# Altium PCB LSR41.PcbDoc (part 2 of 2)
Units mm, origin at the board's own origin, x right, y up, seen from the top; angles counter-clockwise.
Board outline 207.01 x 107.19 mm, 2 copper layers (Top Layer, Bottom Layer), stack 1.671 mm thick; 209 components, 141 nets, 682 pads, 307 vias.
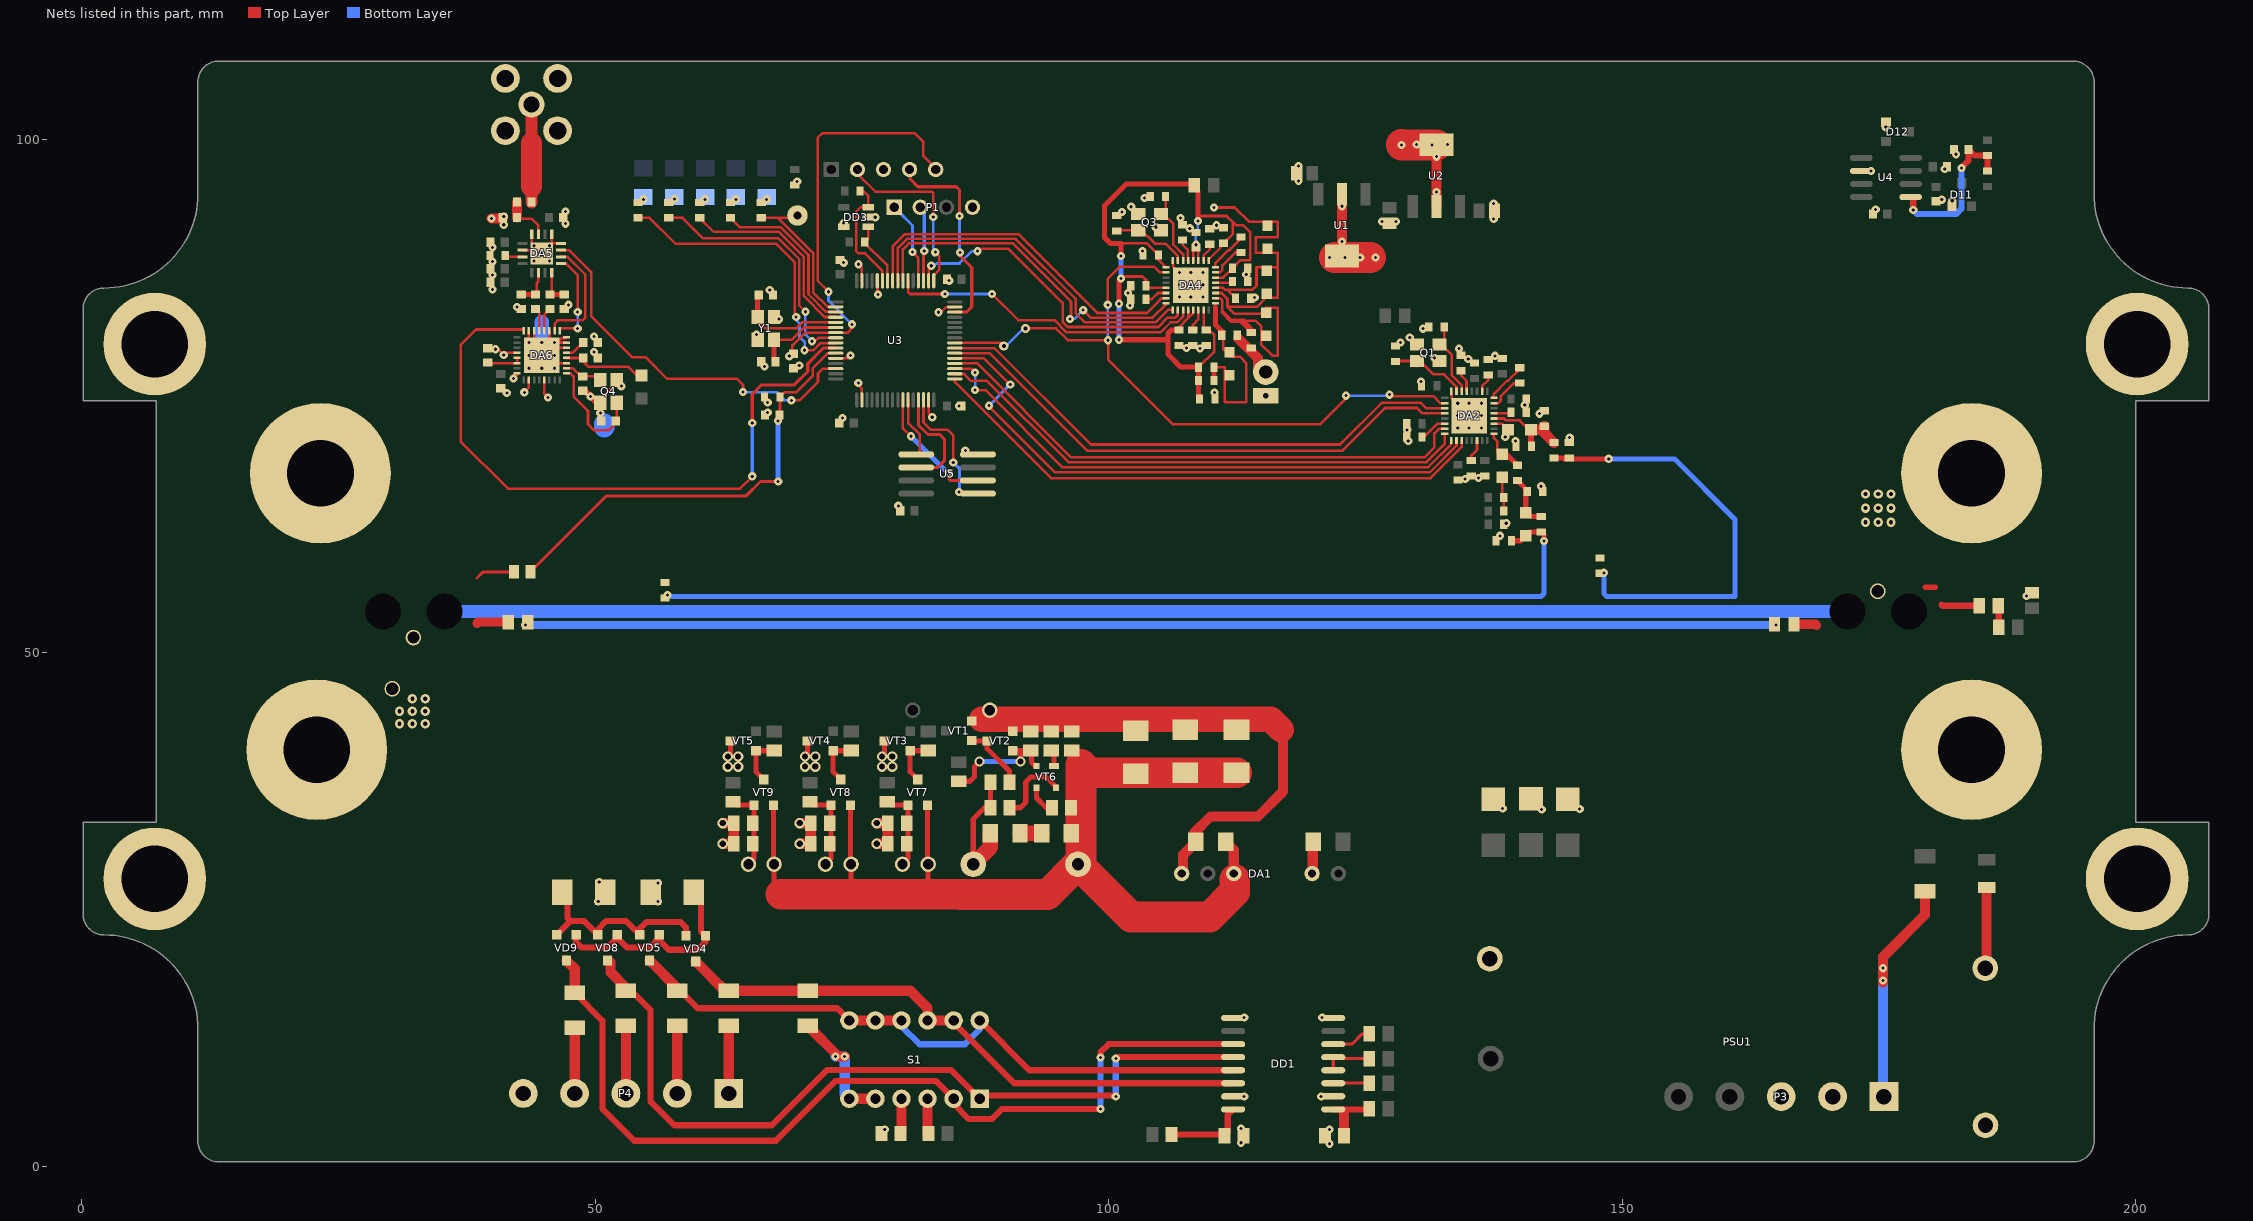
[diagram p2: the nets of this part, all layers, seen from the top]

## Via types
v1: diameter 0.8, hole 0.3, Top Layer to Bottom Layer, tented both sides, 263 vias
v2: diameter 1, hole 0.6, Top Layer to Bottom Layer, tented both sides, 21 vias
v3: diameter 0.9, hole 0.4, Top Layer to Bottom Layer, tented both sides, 19 vias
v4: diameter 0.5, hole 0.3, Top Layer to Bottom Layer, tented both sides, 4 vias

## Nets (pads, with @x,y where several pads share a name; then routed paths per layer and width w, separated by ;. In a path a pad name is that pad's centre, name@x,y a point inside that pad or via, vN(x,y) a via of type N, cw(c..) or ccw(c..) an arc to the next point about the centre after c; other vN are vias at no path point) (continued)
GND: C1.1 C7.1 C10.1 C11.1 C12.1 C13.1 C14.2 C15.1 C16.2 C17.1 C18.1 C19.1 C22.1 C23.1 C25.1 C26.1 C27.1 C28.1 C30.1 C31.2 C32.2 C33.2 C34.1 C35.2 C36.2 C38.1 C39.2 C40.2 C42.2 C43.2 C44.2 C45.2 C46.2 C47.2 C48.1 C49.1 C50.1 C51.1 C53.1 C56.1 C57.1 C60.2 C61.1 C63.2 C65.1 C67.1 C67.2 C69.1 C71.1 C80.1 C81.1 C82.1 C83.1 C87.1 C88.1 C89.2 C90.2 C92.2 C93.1 C95.1 C96.1 C97.1 C99.1 C100.1 C101.1 C102.1 C103.2 D2.1 D3.1 D4.1 D11.1 D12.1 DA1.2 DA2.19 DA2.32 DA2.33 DA4.18 DA4.19 DA4.20 DA4.32 DA4.33 DA5.8 DA5.9 DA5.12 DA5.14 DA5.17 DA6.3 DA6.6 DA6.7 DA6.12 DA6.16 DA6.18 DA6.21 DA6.27 DA6.30 DA6.31 DA6.32 DA6.33 DD1.2 DD1.8 DD3.2 DD3.5 FV3.1 L1.1 L7.1 L7.2 L9.1 L9.2 L11.1 L11.2 P1.4 P3.2 P3.3 pad.0@7.12,28 pad.0@7.12,80.07 pad.0@22.9,40.575 pad.0@23.25,67.5 pad.0@115.3,75.05 pad.0@184.03,40.575 pad.0@184.03,67.5 pad.0@200.16,28 pad.0@200.16,80.07 pad.2@41.26,100.86 pad.3 pad.4@46.34,105.94 pad.5@41.26,105.94 PSU1.2 PSU1.4 Q1.2 Q1.4 Q3.2 Q3.4 Q4.2 Q4.4 R33.1 R34.1 R36.1 R38.2 R39.2 R40.2 R53.1 R54.1 U1.2 U1.4 U2.2 U2.4 U3.12 U3.18 U3.31 U3.47 U3.60 U3.63 U4.2 U5.4 Y1.2 Y1.4 | length 133.1
  Top Layer w0.25: DA5.14@42.925,89.225 DA5.17@44.475,89.225 ; DA5.17@43.825,89.875 DA5.12@43.825,90.775 ; DA6.6@44.05,81.375 44.05,79.725 v1(44.8,78.975) ; DA5.17@44.55,89.15 v2(44.8,88.9) v4(45.55,89.65) ; DA5.9@45.775,90.775 45.775,89.875 DA5.8@46.675,89.875 ; U3.12@73.423,78.689 74.614,78.689 v1(74.875,78.95) ; v1(75.625,76.275) 75.625,76.1 75.973,75.752 U3.18@75.973,74.639 ; v1(75.65,87.85) 75.7,87.85 75.973,87.577 U3.63@75.973,86.239 ; U3.60@77.473,86.239 77.498,86.214 77.498,84.952 v1(77.55,84.9) ; U3.31@82.473,74.639 82.473,73.302 v1(82.825,72.95) ; v1(83.425,83.175) 83.7,83.175 84.189,83.664 84.998,83.664 U3.47@85.023,83.689 ; DA4.32@106.25,88.2 106.25,87.835 106.275,87.81 106.275,87.575 DA4.33@106.6,87.25 ; v1(110.25,93.375) 112.275,93.375 113.65,92 116.45,92 116.45,90.475 114.325,90.475 114.325,88.95 116.45,88.95 116.45,84.6 115.35,84.6 114.45,83.7 111.575,83.7 112.225,83.05 114.775,83.05 115.325,83.6 116.475,83.6 116.475,78.95 115.95,78.95 114.85,80.05 114.85,81.825 114.325,82.35 113.15,82.35 ; DA4.18@110.4,84.55 110.864,84.55 111.075,84.339 111.075,83.217 ; DA4.19@110.4,85.05 111,85.05 111.575,84.475 ; DA4.20@110.4,85.55 111.136,85.55 111.311,85.375 111.525,85.375 ; C67.2@112.35,84.85 C67.2@112.35,84.55 111.525,85.375 ; 116.4,87.55 114.4,87.55 114.4,85.74 114.035,85.375 111.525,85.375 ; DA2.32@133.376,75.479 133.376,75.113 133.401,75.088 133.401,74.804 DA2.33@135.126,73.079 ; DA2.19@137.526,72.329 138.306,72.329 L1.1@138.906,71.729
  Top Layer w0.254: v1(40.3,79.575) 40.55,79.575 v1(41.1,79.025) 41.3,79.225 DA6.12@42.4,79.225 ; v1(42.05,76.725) 42.4,77.075 DA6.16@42.4,77.225 ; v1(43.1,75.375) 43.55,75.825 DA6.18@43.55,76.575 ; DA6.7@43.55,81.375 v1(43.55,80.225) DA6.33@44.05,79.725 ; DA6.33@44.8,79.914 v1(44.8,78.975) ; DA6.21@45.05,76.575 45.05,75.225 v1(45.4,74.875) ; DA6.3@45.55,81.375 45.55,79.725 DA6.33@45.8,79.725 ; DA6.27@47.2,78.225 45.55,78.225 v1(44.8,78.975) ; DA6.30@47.2,79.725 DA6.33@45.8,79.725 ; DA6.31@47.2,80.225 DA6.33@46.3,80.225 ; DA6.32@47.2,80.725 47.133,80.658 46.733,80.658 DA6.33@46.3,80.225 ; Q4.2@50.5,74.375 50.5,74.756 52.1,76.356 Q4.4@52.1,76.575 ; DA2.33@134.187,73.079 DA2.33@135.126,73.079 ; DA2.33@134.376,74.079 135.126,73.329 DA2.33@135.126,73.079 ; DA2.33@135.876,73.829 DA2.33@135.126,73.079 ; v1(44.8,78.975) 45.05,78.975 DA6.33@45.8,79.725 ; DA6.33@45.8,79.725 DA6.33@46.3,80.225
  Top Layer w0.3: 111.575,83.7 111.575,84.475
  Top Layer w0.4: 111.075,83.217 111.125,83.167 111.125,83.16 111.935,82.35 113.15,82.35
  Top Layer w0.6: C102.1@48.8,75.525 49,75.525 v1(49.55,74.975) 50.15,74.375 Q4.2@50.5,74.375 ; 113.05,82.25 C71.1@113.9,81.4
  Top Layer w1: v1(39.9,92.3) C100.1@41,92.3 ; DA1.2@119.875,29.125 119.875,31.575 C1.1@119.925,31.625 ; U1.4@122.725,88.65 U1.2@122.725,94.65 ; U2.2@131.925,93.475 U2.4@131.925,99.475
  Top Layer w3: U1.4@122,88.5 125.5,88.5 ; v1@128.5,99.5 v1(128.525,99.475) U2.4@131.925,99.475
  Bottom Layer w1.4: v1@44.8,80.475 44.8,82.225
  Bottom Layer w2: 50.9,72 50.9,72.3
  other v1: 121.5,2.2 121.5,3.6 120.7,6.8 120.8,14.5 142.175,34.75 145.875,34.8 138.375,34.85 189.375,55.55 138.1,61.404 138.726,62.629 79.525,64.325 142.126,66.229 134.726,66.929 136.026,67.029 86.05,69.7 129.176,70.629 139.626,70.629 144.901,70.979 138.626,71.029 129.076,71.729 133.998,71.912 135.098,71.912 136.298,71.912 74.1,72.875 133.998,73.112 135.098,73.112 136.298,73.112 141.951,73.3 50.5,73.375 66.8,73.4 85.427,74.036 140.526,74.129 133.998,74.312 135.098,74.312 136.298,74.312 66.8,74.375 41.4,75.3 110.325,75.35 52.55,75.975 130.426,76.429 43.55,77.725 44.8,77.725 46.05,77.725 66.5,77.889 69.875,78 135.026,78.629 131.726,78.729 137.626,78.929 43.55,78.975 46.05,78.975 49.9,79.3 108.9,79.65 134.126,79.629 107.575,79.7 44.8,80.225 46.05,80.225 128.426,80.229 129.326,80.729 49.9,80.8 65.7,81 130.626,81.579 67.9,82.5 42.4,83.7 102.075,83.825 47.4,83.9 114.225,84.6 106.9,84.65 108,84.65 109.2,84.65 101.9,85.05 67,85.339 40,85.4 106.9,85.85 108,85.85 109.2,85.85 84.475,86.25 40,86.8 113.4,86.85 106.9,87.05 108,87.05 109.2,87.05 74.2,88 40,88.1 121.5,88.5 123,88.5 124.5,88.5 126,88.5 103.3,89.15 40,89.5 122.725,90.05 107.9,91.35 104.6,91.45 110.5,91.65 41.1,91.7 47.1,91.8 74.2,91.85 126.625,92 128,92 137.5,92.25 107,92.35 77.275,92.425 41.1,92.5 101.3,92.95 47.1,93 174.699,93.186 102.2,93.45 122.725,93.5 137.5,93.775 182.152,94.035 181.131,94.135 103.5,94.3 131.925,94.875 69.675,95.9 118.5,95.975 174.252,96.935 181.427,97.135 118.5,97.425 131.925,98.325 182.527,98.56 131.5,99.475 130,99.5 133,99.5 175.675,101.2
  other v3: 30.95,43.1 32.2,43.1 33.45,43.1 30.95,44.319 32.2,44.319 33.45,44.319 32.2,45.538 33.45,45.538 173.7,62.728 174.95,62.728 176.2,62.728 173.7,64.1 174.95,64.1 176.2,64.1 173.7,65.472 174.95,65.472 176.2,65.472
  other v4: 44.05,88.15 45.55,88.15 44.05,89.65
GND_1: C2.1 C3.1 DA1.5 FU1.1 R13.1 R16.2 VD1.2 VD2.2 VD3.2 VT7.2 VT8.2 VT9.2 XT6.1 XT7.1 XT8.1 | length 113.7
  Top Layer w0.5: XT8.1@67.375,29.475 VT9.2@67.375,35.175 ; XT8.1@67.425,29.425 67.425,27.15 68.075,26.5 ; XT7.1@74.875,29.475 VT8.2@74.875,35.175 ; XT7.1@74.925,29.425 74.925,26.525 74.95,26.5 ; 82.325,26.5 82.425,26.6 XT6.1@82.425,29.425 ; XT6.1@82.375,29.475 VT7.2@82.375,35.175 ; 84.425,27.425 93.425,27.425
  Top Layer w1: C2.1@111.402,31.596 112.195,30.804 DA1.5@112.195,28.515
  Top Layer w3: 68.075,26.5 74.95,26.5 82.325,26.5 85.578,26.5 85.603,26.475 94.075,26.475 FU1.1@97.025,29.425 ; DA1.5@112.275,27.925 112.275,26.7 109.85,24.275 102.175,24.275 FU1.1@97.025,29.425 ; VD3.2@112.45,38.325 VD2.2@107.45,38.325 98.15,38.325 97.325,39.15 97.325,29.725 FU1.1@97.025,29.425
GND_IS1: C4.1 C5.1 C6.1 C9.1 DD1.9 DD1.15 FU1.2 P4.5 R10.1 R11.1 R12.1 R14.1 R15.1 R17.1 R24.1 VD6.1 VD7.2 VT3.3 VT4.3 VT5.3 | length 37.5
  Top Layer w0.25: v2@62.9,38.95 v2(62.925,38.925) v2(63.925,38.925) v2(63.925,39.925) v2(62.925,39.925) ; v2@70.4,39.9 v2(70.425,39.925) v2(71.425,39.925) v2(71.425,38.925) v2(70.425,38.925) ; v2@77.9,38.95 v2(77.925,38.925) v2(78.925,38.925) v2(78.925,39.925) v2(77.925,39.925)
  Top Layer w0.5: v2@63.175,40.175 VT5.3@63.175,41.425 ; v2@70.675,40.175 VT4.3@70.675,41.425 ; v2@78.175,40.175 VT3.3@78.175,41.425 ; FU1.2@86.825,29.425 86.825,33.825 87.925,34.925 R14.1@88.5,34.925 R15.1@88.5,36.925
  Top Layer w1: v2(62.425,31.425) R12.1@63.5,31.425 C6.1@63.5,33.425 v2(62.425,33.425) ; v2(69.925,31.425) R11.1@71,31.425 C5.1@71,33.425 v2(69.925,33.425) ; v2(77.425,31.425) R10.1@78.5,31.425 C4.1@78.5,33.425 v2(77.425,33.425)
  Top Layer w1.5: FU1.2@86.825,29.425 88.475,31.075 R17.1@88.475,32.425
  other v1: 112.9,2.3 78.2,3.6 112.9,3.7 113.2,6.8 113.2,14.5 50.3,25.8 56.1,25.8 56.1,27.6 50.4,27.7
HGM: DA5.7 U3.14 | length 37.5
  Top Layer w0.25: DA5.7@46.675,89.225 47.475,89.225 49.6,87.1 49.6,82.8 53.6,78.8 54.9,78.8 57,76.7 63.8,76.7 64.4,76.1 v1(64.4,75.4) ; v1(69.1,74.6) 69.9,74.6 71.7,76.4 71.7,77.2 72.189,77.689 U3.14@73.423,77.689
  Bottom Layer w0.25: v1(64.4,75.4) 67.7,75.4 68.5,74.6 v1(69.1,74.6)
I2C1_SCL: DD3.1 R50.1 U3.58 | length 6.4
  Top Layer w0.25: DD3.1@76.6,91.5 76.6,90.375 76.2,89.975 78.448,87.727 78.448,86.264 U3.58@78.473,86.239
I2C1_SDA: DD3.3 R48.1 U3.59 | length 11.3
  Top Layer w0.25: R48.1@76.1,94.975 76.6,94.475 DD3.3@76.6,93.4 75.85,93.4 75.425,92.975 75.425,89.125 75.65,88.9 76.275,88.9 77.948,87.227 77.948,86.264 U3.59@77.973,86.239
LED1: pad.0@69.7,92.6 R41.2 U3.2 | length 15
  Top Layer w0.25: R41.2@66.178,92.371 67.804,92.371 ; pad.0@69.7,92.6 69.071,92.371 67.804,92.371 ; U3.2@73.423,83.689 73.398,83.714 72.626,83.714 71.225,85.115 71.225,88.95 67.804,92.371
LED2: R42.2 U3.3 | length 16.3
  Top Layer w0.25: R42.2@63.178,92.371 64.099,91.45 68.086,91.45 70.775,88.761 70.775,84.929 72.49,83.214 73.398,83.214 U3.3@73.423,83.189
LED3: R43.2 U3.4 | length 19.5
  Top Layer w0.25: R43.2@60.178,92.371 61.549,91 67.9,91 70.325,88.575 70.325,84.742 72.353,82.714 73.398,82.714 U3.4@73.423,82.689
LED4: R44.2 U3.8 | length 25.3
  Top Layer w0.25: R44.2@57.178,92.371 58.504,92.371 60.475,90.4 67.825,90.4 69.875,88.35 69.875,83.825 v1(70.475,83.225) ; v1(71.125,80.35) 71.425,80.35 71.764,80.689 U3.8@73.423,80.689
  Bottom Layer w0.25: v1(70.475,83.225) 70.475,81 v1(71.125,80.35)
LED5: R47.2 U3.9 | length 29.3
  Top Layer w0.25: R47.2@54.178,92.371 55.304,92.371 57.85,89.825 67.65,89.825 69.425,88.05 69.425,82.85 v1(69.575,82.7) ; v1(70.392,79.473) 71.273,79.473 71.965,80.164 73.398,80.164 U3.9@73.423,80.189
  Bottom Layer w0.25: v1(69.575,82.7) 69.575,82.425 69.9,82.1 69.9,80.775 70.392,80.283 v1(70.392,79.473)
LF_IO0: DA2.10 U3.37 | length 59.3
  Top Layer w0.25: U3.37@85.023,78.689 87.861,78.689 90.15,76.4 90.15,76.15 v1@90.288,76.012 ; v1@88.325,74.05 94.8,67.575 131.272,67.575 133.876,70.179 DA2.10@133.876,70.679
  Bottom Layer w0.3: v1(88.35,74.075) v1(90.425,76.15)
LF_IO2: DA2.4 U3.38 | length 53.6
  Top Layer w0.25: U3.38@85.023,79.189 88.411,79.189 97.9,69.7 122.775,69.7 126.929,73.854 130.046,73.854 130.571,73.329 DA2.4@132.726,73.329
LF_IO3: DA2.3 U3.39 | length 53.5
  Top Layer w0.25: U3.39@85.023,79.689 85.048,79.664 88.911,79.664 98.275,70.3 122.55,70.3 126.6,74.35 130.4,74.35 130.921,73.829 DA2.3@132.726,73.829
LF_MISO: DA2.9 U3.35 | length 54.7
  Top Layer w0.25: U3.35@85.023,77.689 86.611,77.689 v1(87,77.3) v1@87,77.379 ; v1(87,75.6) 88,75.6 95.525,68.075 131.124,68.075 ; 131.118,68.081 133.376,70.34 DA2.9@133.376,70.679
  Bottom Layer w0.25: v1(87,75.6) v1(87,77.3)
LF_MOSI: DA2.7 U3.36 | length 53.5
  Top Layer w0.254: U3.36@85.023,78.175 85.06,78.212 87.188,78.212 96.35,69.05 130.747,69.05 131.726,70.029 131.726,71.39 132.165,71.829 DA2.7@132.726,71.829
LF_NCS: DA2.11 U3.33 | length 55.4
  Top Layer w0.25: U3.33@85.023,76.689 85.023,76.377 94.375,67.025 131.358,67.025 134.376,70.042 DA2.11@134.376,70.679
LF_SCK: DA2.8 U3.34 | length 53
  Top Layer w0.254: U3.34@85.023,77.189 85.046,77.166 85.934,77.166 86.6,76.5 88.15,76.5 96.075,68.575 130.972,68.575 132.726,70.329 DA2.8@132.726,71.329
MEAS_VIN: C31.1 R37.1 R38.1 U3.11 | length 43.7
  Top Layer w0.25: v1(67.8,72.6) C31.1@67.8,73.275 ; C31.1@67.95,73.175 68,73.225 R38.1@68,74.925 68.475,75.4 69.6,75.4 71.2,77 71.2,77.738 72.626,79.164 73.398,79.164 U3.11@73.423,79.189
  Top Layer w0.3: R37.1@43.7,57.9 51.1,65.3 64.7,65.3 66.1,66.7 v1(67.825,66.7)
  Bottom Layer w0.25: v1@67.8,66.775 67.8,66.725 v1(67.825,66.7)
  Bottom Layer w0.5: v1@67.8,66.775 v1(67.8,72.6)
NetC2_2: C2.2 C3.2 DA1.7 R1.2 R2.2 VD1.1 VD2.1 VD3.1 VT1.2 VT2.2 XT1.1 | length 49.6
  Top Layer w1: DA1.7@107.25,28.515 107.25,30.344 108.325,31.419 108.325,32.475 109.925,34.075 114.55,34.075 116.975,36.5 116.975,41.75
  Top Layer w2.5: 87.65,43.55 115.8,43.55 116.825,42.525
NetC4_2: C4.2 R6.1 R10.2 VT7.1 XT3.1 | length 7.7
  Top Layer w0.5: R6.1@78.75,35.175 VT7.1@80.475,35.175 80.475,29.975 XT3.1@79.925,29.425
NetC5_2: C5.2 R7.1 R11.2 VT8.1 XT4.1 | length 6.9
  Top Layer w0.5: R7.1@71.25,35.175 VT8.1@72.975,35.175 72.975,29.975
NetC6_2: C6.2 R8.1 R12.2 VT9.1 XT5.1 | length 8.2
  Top Layer w0.5: R8.1@63.425,35.5 63.75,35.175 VT9.1@65.475,35.175 65.475,29.975 XT5.1@64.925,29.425
NetC7_2: C7.2 DD1.1 R19.1 | length 5.8
  Top Layer w0.6: DD1.1@121.875,5.555 123.2,5.555 125.33,5.555 R19.1@125.375,5.6
  Top Layer w1: C7.2@122.925,3 122.925,5.28
NetC9_2: C9.2 DD1.16 R22.1 | length 8.1
  Top Layer w0.6: R22.1@106.125,3.1 111.175,3.1 C9.2@111.275,3 111.6,3.325 111.6,5.03 DD1.16@112.125,5.555
NetC16_1: C16.1 DA2.30 Q1.3 | length 7.4
  Top Layer w0.25: Q1.3@132.226,80.029 Q1.3@132.326,80.129 ; C16.1@132.676,81.729 132.676,80.479 Q1.3@132.326,80.129 ; DA2.30@134.376,75.479 134.376,76.079 133.426,77.029 133.426,79.029 Q1.3@132.326,80.129
NetC18_2: C18.2 DA2.20 L1.2 R32.2 R33.2 | length 8.9
  Top Layer w0.25: DA2.20@137.526,72.829 138.516,72.829 138.691,72.654 140.021,72.654 L1.2@141.046,71.629 ; C18.2@141.146,70.159 C18.2@141.176,70.129
  Top Layer w0.6: C18.2@141.146,70.159 L1.2@141.146,71.729
  Top Layer w1: L1.2@141.146,71.729 R33.2@142.426,71.729 ; R33.2@142.426,72.079 142.426,71.429 R32.2@143.376,70.479
NetC19_2: C19.2 DA2.31 Q1.1 | length 7.9
  Top Layer w0.25: C19.2@127.926,78.379 127.976,78.429 Q1.1@130.026,78.429 Q1.1@130.026,77.929 ; Q1.1@130.176,78.579 131.626,77.129 132.66,77.129 133.876,75.914 DA2.31@133.876,75.479
NetC20_1: C20.1 C21.1 C23.2 L2.1 | length 5.1
  Top Layer w0.5: C21.1@139.826,66.779 140.626,65.979 L2.1@140.626,63.649 ; L2.1@140.656,63.749 141.126,63.279 C20.1@142.126,63.279
NetC21_2: C21.2 DA2.17 L3.2 | length 3.9
  Top Layer w0.25: DA2.17@137.526,71.329 137.526,70.929 137.826,70.629 L3.2@137.826,69.529
  Top Layer w0.5: L3.2@138.326,69.349 138.756,69.349 C21.2@139.826,68.279
NetC24_1: C24.1 L3.1 R35.2 | length 3.3
  Top Layer w0.25: L3.1@138.326,67.109 138.326,65.279 R35.2@138.476,65.129 C24.1@138.476,63.829
NetC25_2: C25.2 DA2.26 | length 1.8
  Top Layer w0.25: DA2.26@136.376,75.479 136.376,75.979 136.976,76.579 C25.2@136.976,77.079
NetC26_2: C26.2 DA2.29 | length 2.2
  Top Layer w0.25: C26.2@134.326,77.479 134.326,77.029 134.851,76.504 134.851,75.504 DA2.29@134.876,75.479
NetC27_2: C27.2 DA2.6 | length 2.6
  Top Layer w0.25: C27.2@130.676,70.979 132.026,72.329 DA2.6@132.726,72.329
NetC28_2: C28.2 DA2.21 | length 1.7
  Top Layer w0.25: DA2.21@137.526,73.329 139.076,73.329 C28.2@139.176,73.429
NetC29_1: C29.1 DA2.23 | length 3.6
  Top Layer w0.25: DA2.23@137.526,74.329 137.96,74.329 138.201,74.569 138.201,75.014 139.466,76.279 C29.1@140.026,76.279
NetC29_2: C29.2 DA2.24 | length 4
  Top Layer w0.25: DA2.24@137.526,74.829 137.526,75.229 138.801,76.504 138.91,76.504 140.026,77.619 C29.2@140.026,77.779
NetC40_1: C40.1 U3.6 Y1.3 | length 8.7
  Top Layer w0.25: C40.1@67.423,78.514 C40.1@67.573,78.364 ; Y1.3@67.423,80.514 69.153,80.514 70.328,81.689 U3.6@73.423,81.689
  Top Layer w0.5: C40.1@67.423,78.514 Y1.3@67.423,80.514
NetC46_1: C46.1 U3.5 Y1.1 | length 10.7
  Top Layer w0.25: Y1.1@65.823,82.339 66.537,81.625 69.627,81.625 70.191,82.189 U3.5@73.423,82.189
  Top Layer w0.5: Y1.1@65.823,82.339 C46.1@65.823,84.864
NetC50_2: C50.2 R45.2 R46.2 U4.5 | length 16.1
  Top Layer w0.6: U4.5@178.1,94.395 178.352,94.143 v1(178.352,93.135) ; v1(183.052,97.235) 183.727,97.91 C50.2@183.727,99.035 184.329,98.433 R45.2@185.581,98.433 R46.2@185.581,96.933
  Bottom Layer w0.6: v1(178.352,93.135) 178.752,92.735 182.552,92.735 183.052,93.235 v1(183.052,97.235)
NetC63_1: C63.1 DA4.30 Q3.3 | length 7.4
  Top Layer w0.25: Q3.3@105.1,92.75 Q3.3@105.2,92.85 ; C63.1@105.55,94.45 105.55,93.2 Q3.3@105.2,92.85 ; DA4.30@107.25,88.2 107.25,88.8 106.3,89.75 106.3,91.75 Q3.3@105.2,92.85
NetC69_2: C69.2 DA4.31 Q3.1 | length 7.9
  Top Layer w0.25: C69.2@100.8,91.1 100.85,91.15 Q3.1@102.9,91.15 Q3.1@102.9,90.65 ; Q3.1@103.05,91.3 104.5,89.85 105.535,89.85 106.75,88.635 DA4.31@106.75,88.2
NetC71_2: C71.2 C73.1 pad.0@115.3,77.35 | length 4
  Top Layer w1: C73.1@112.65,80.6 114.55,78.7 pad.0@114.55,77.425 ; pad.0@115.25,77.35 pad.0@115.3,77.35
NetC73_2: C73.2 C75.1 DA4.17 L13.1 L13.2 R51.2 | length 19.3
  Top Layer w0.25: R51.2@110.25,77.825 111.325,77.825 111.325,74.4 113.4,74.4 113.4,78.225 112.775,78.85 111.9,78.85 111.15,79.6 C73.2@111.15,81.2 ; 110.4,83.65 DA4.17@110.4,84.05
  Top Layer w0.5: C75.1@110.25,76.525 R51.2@110.25,77.825 ; 110.4,83.65 110.4,81.95 C73.2@111.15,81.2
NetC80_2: C80.2 DA4.26 | length 1.8
  Top Layer w0.25: DA4.26@109.25,88.2 109.25,88.7 109.85,89.3 C80.2@109.85,89.8
NetC81_2: C81.2 DA4.29 | length 2.2
  Top Layer w0.25: C81.2@107.2,90.2 107.2,89.75 107.725,89.225 107.725,88.225 DA4.29@107.75,88.2
NetC82_2: C82.2 DA4.6 | length 2.2
  Top Layer w0.25: C82.2@103.65,84.45 104.2,84.45 104.8,85.05 DA4.6@105.6,85.05
NetC83_2: C83.2 DA4.21 | length 1.7
  Top Layer w0.25: DA4.21@110.4,86.05 111.95,86.05 C83.2@112.05,86.15
NetC86_1: C86.1 DA4.23 | length 3.6
  Top Layer w0.25: DA4.23@110.4,87.05 110.835,87.05 111.075,87.29 111.075,87.735 112.34,89 C86.1@112.9,89
NetC86_2: C86.2 DA4.24 | length 4
  Top Layer w0.25: DA4.24@110.4,87.55 110.4,87.95 111.675,89.225 111.785,89.225 112.9,90.34 C86.2@112.9,90.5
NetC90_1: C90.1 C91.2 DA5.2 | length 3.6
  Top Layer w0.25: C91.2@44.2,84.9 44.3,85 44.3,86 44.475,86.175 DA5.2@44.475,87.025
  Top Layer w0.5: C90.1@42.8,84.9 C91.2@44.2,84.9
NetC91_1: C91.1 DA6.5 | length 1.8
  Top Layer w0.254: DA6.5@44.55,81.375 C91.1@44.55,83.2
NetC94_1: C94.1 DA6.4 | length 2.4
  Top Layer w0.254: DA6.4@45.05,81.375 45.05,82.95 C94.1@45.6,83.5
NetC94_2: C94.2 C95.2 DA5.4 | length 3.7
  Top Layer w0.25: C94.2@45.6,84.9 45.775,85.075 DA5.4@45.775,87.025
  Top Layer w0.5: C94.2@45.6,84.9 C95.2@47.1,84.9
NetC96_2: C96.2 DA6.28 L14.2 | length 8.2
  Top Layer w0.254: DA6.28@47.2,78.725 C96.2@48.85,78.725 48.85,78.35 49.325,77.875 53.2,77.875 54.055,77.02 L14.2@54.5,77.02
NetC98_1: C98.1 C100.2 DA5.11 | length 4.5
  Top Layer w0.25: C100.2@42.6,92.3 43.8,92.3 44.475,91.625 DA5.11@44.475,90.775
  Top Layer w1: C100.2@42.4,92.4 C98.1@42.4,93.9
NetC98_2: C98.2 pad.1@43.8,103.4 | length 9.7
  Top Layer w1.2: C98.2@43.8,93.9 43.8,95.4 ; 43.8,99.7 pad.1@43.8,103.6
  Top Layer w2: 43.8,95.4 43.8,99.7
NetC99_2: C99.2 DA6.29 | length 2.1
  Top Layer w0.254: DA6.29@47.2,79.225 47.8,79.225 48.8,80.225 C99.2@48.85,80.225
NetC101_2: C101.2 DA6.13 DA6.14 | length 3.3
  Top Layer w0.254: C101.2@39.55,78.225 DA6.14@42.4,78.225 DA6.13@42.4,78.725
NetC102_2: C102.2 DA6.26 Q4.1 | length 3.8
  Top Layer w0.254: DA6.26@47.2,77.725 47.8,77.725 48.6,76.925 C102.2@48.8,76.925 50.15,76.925 Q4.1@50.5,76.575
NetC103_1: C103.1 DA6.25 Q4.3 | length 12.2
  Top Layer w0.254: DA6.25@47.2,77.225 47.601,77.225 47.9,76.926 47.9,74.975 49.3,73.575 49.3,72.275 49.9,71.675 51.3,71.675 52.1,72.475 Q4.3@52.1,74.375 52.1,73.525
NetD5_2: D5.2 R41.1
  other v1: 66.7,94.175
NetD6_2: D6.2 R42.1
  other v1: 63.7,94.175
NetD7_2: D7.2 R43.1
  other v1: 60.7,94.175
NetD8_2: D8.2 R44.1
  other v1: 57.728,94.2
NetD9_2: D9.2 R47.1
  other v1: 54.7,94.175
NetDA2_14: DA2.14 R36.2 | length 2.2
  Top Layer w0.25: R36.2@135.326,68.729 135.326,69.229 135.876,69.779 DA2.14@135.876,70.679
NetDA4_14: DA4.14 R53.2 | length 2.2
  Top Layer w0.25: R53.2@108.2,81.45 108.2,81.95 108.75,82.5 DA4.14@108.75,83.4
NetDA5_5: DA5.5 DA6.1 | length 9
  Top Layer w0.25: DA6.1@46.6,81.6 v1(48.3,81.6) ; DA5.5@46.675,87.925 47.175,87.925 48.3,86.8 v1(48.3,83.2)
  Bottom Layer w0.25: v1(48.3,81.6) v1(48.3,83.2)
NetDA5_6: DA5.6 DA6.2 | length 11.2
  Top Layer w0.25: DA6.2@46.05,81.375 46.05,82.05 46.4,82.4 48.8,82.4 49.025,82.625 49.025,86.875 47.325,88.575 DA5.6@46.675,88.575
NetDA5_15: DA5.15 R54.2 | length 1.6
  Top Layer w0.25: R54.2@41.25,88.7 R54.2@41.3,88.65 ; R54.2@41.375,88.575 DA5.15@42.925,88.575
NetDD1_3: DD1.3 R28.2 | length 3.5
  Top Layer w0.3: DD1.3@121.875,8.095 121.88,8.1 R28.2@125.375,8.1
NetDD1_4: DD1.4 DD1.5 R27.2 | length 4.8
  Top Layer w0.3: DD1.4@121.875,9.365 DD1.5@121.875,10.635 122.01,10.5 R27.2@125.375,10.5
NetDD1_6: DD1.6 R26.2 | length 3.9
  Top Layer w0.3: DD1.6@121.875,11.905 123.705,11.905 124.7,12.9 R26.2@125.375,12.9
NetDD1_11: DD1.11 RK5.1 S1.2 VD9.3 | length 89.1
  Top Layer w0.6: RK5.1@48,16.9 50.7,14.2 50.7,5.6 53.8,2.5 67.6,2.5 73.4,8.3 83.2,8.3 S1.2@84.91,6.59 84.91,6.09 86.4,4.6 88.635,4.6 89.635,5.6 v1(99.2,5.6) ; v1(99.2,10.6) 99.2,11.1 100.005,11.905 DD1.11@112.125,11.905
  Top Layer w1: VD9.3@47.2,20.05 48,19.25 RK5.1@48,16.9
  Bottom Layer w0.6: v1(99.2,5.6) v1(99.2,10.6)
NetDD1_12: DD1.12 RK4.1 S1.1 VD8.3 | length 79.7
  Top Layer w0.6: RK4.1@53.5,17.1 55.4,15.2 55.4,6.3 57.7,4 67.2,4 72.6,9.4 84.64,9.4 S1.1@87.45,6.59 87.76,6.9 v1@100.7,6.9 ; v1(100.7,10.5) 100.835,10.635 DD1.12@112.125,10.635
  Top Layer w1: VD8.3@51.5,19.9 51.5,18.9 RK4.1@53.05,17.35
  Bottom Layer w0.6: v1(100.7,6.8) v1(100.7,10.5)
NetDD1_13: DD1.13 RK2.1 S1.7 S1.8 S1.9 S1.12 VD5.3 | length 64.1
  Top Layer w0.6: RK2.1@58,17.35 RK2.1@58,17.1 58.3,17.1 60,15.4 73.56,15.4 S1.7@74.75,14.21 ; S1.12@87.45,14.21 92.295,9.365 DD1.13@112.125,9.365
  Top Layer w1: VD5.3@55.3,20.05 RK2.1@58,17.35 ; S1.7@74.75,14.21 S1.8@77.29,14.21 S1.9@79.83,14.21
  Bottom Layer w0.6: S1.9@79.83,14.21 79.83,13.67 81.6,11.9 86,11.9 87.45,13.35 S1.12@87.45,14.21
NetDD1_14: DD1.14 R20.2 RK1.1 S1.10 S1.11 VD4.3 | length 59
  Top Layer w0.6: 62.3,17.8 RK1.1@63,17.1 ; S1.11@84.91,14.21 84.91,13.99 90.805,8.095 DD1.14@112.125,8.095
  Top Layer w1: VD4.3@59.8,19.95 RK1.1@62.825,16.925 ; RK1.1@63,17.1 80.68,17.1 82.37,15.41 S1.10@82.37,14.21 S1.11@84.91,14.21
NetF1_2: F1.2 PSU1.1 | length 7.9
  Top Layer w1: PSU1.1@185.375,19.3 185.5,19.425 F1.2@185.5,27.15
NetFV1_1: FV1.1 FV2.1 L5.1 pad.1@29.346,54.038 pad.1@177.936,54.038 pad.2@35.315,54.038 pad.2@171.967,54.038 R37.2 R56.1 R57.1 | length 151.9
  Top Layer w0.3: 38.5,57.3 39.1,57.9 R37.2@42.1,57.9
  Top Layer w0.5: 179.5,56.4 180.5,56.4
  Top Layer w0.6: 181.1,54.7 181.2,54.6 L5.1@184.775,54.6
  Top Layer w0.9: 38.5,52.9 38.6,53 R56.1@41.55,53 ; R57.1@166.75,52.8 168.845,52.8 168.945,52.7
  Bottom Layer w1.3: pad.2@35.315,54.038 pad.2@171.967,54.038
  Bottom Layer w1.4: pad.2@35.315,54.038 36,54.038
  Bottom Layer w1.905: 171.5,53.571 pad.2@171.967,54.038 172.005,54
NetL4_1: L4.1 L5.2 | length 2.1
  Top Layer w0.6: L5.2@186.625,54.6 186.675,54.55 L4.1@186.675,52.5
NetP3_1: P3.1 RK3.2 | length 23.1
  Top Layer w1: v1@175.42,17.917 175.42,20.43 179.5,24.51 RK3.2@179.5,26.8
  Bottom Layer w1: P3.1@175.4,6.8 v1(175.4,19.3)
  other v1: 175.4,18.1
NetP4_1: P4.1 RK1.2 | length 6.6
  Top Layer w1: P4.1@63,7.1 RK1.2@63,13.7
NetP4_2: P4.2 RK2.2 | length 6.6
  Top Layer w1: P4.2@58,7.1 RK2.2@58,13.7
NetP4_3: P4.3 RK4.2 | length 6.6
  Top Layer w1: P4.3@53,7.1 RK4.2@53,13.7
NetP4_4: P4.4 RK5.2 | length 6.4
  Top Layer w1: P4.4@48,7.1 RK5.2@48,13.5
NetR1_1: R1.1 R3.2 VT2.1 VT6.2 | length 11.9
  Top Layer w0.5: R3.2@85.425,37.5 86.5,37.5 86.925,37.925 86.925,38.925 v2(87.425,39.425) ; VT2.1@90.675,40.475 91.425,40.475 ; v2(91.425,39.425) 91.425,40.475 ; R1.1@92.4,40.475 91.425,40.475 ; R1.1@92.475,40.45 92.475,39.375 VT6.2@92.925,38.925
  Bottom Layer w0.5: v2(87.425,39.425) v2(91.425,39.425)
NetR2_1: R2.1 VT6.1 | length 1.3
  Top Layer w0.5: VT6.1@94.675,38.975 R2.1@94.675,40.25
NetR4_1: R4.1 VT3.1 VT7.3 | length 4.8
  Top Layer w0.5: VT7.3@81.425,37.675 80.675,38.425 VT3.1@80.675,40.475 R4.1@82.4,40.475
NetR5_1: R5.1 VT5.1 VT9.3 | length 4.8
  Top Layer w0.5: VT9.3@66.425,37.675 65.675,38.425 VT5.1@65.675,40.475 R5.1@67.4,40.475
NetR9_1: R9.1 VT4.1 VT8.3 | length 4.8
  Top Layer w0.5: VT8.3@73.925,37.675 73.175,38.425 VT4.1@73.175,40.475 R9.1@74.9,40.475
NetR13_2: R13.2 VT6.3 | length 2.9
  Top Layer w0.5: VT6.3@92.975,36.875 92.975,35.875 93.925,34.925 R13.2@94.5,34.925
NetR14_2: R14.2 VT6.4 | length 7.4
  Top Layer w0.5: R14.2@90.35,34.925 91.425,34.925 91.925,35.425 91.925,37.425 92.425,37.925 93.925,37.925 94.875,36.975 VT6.4@94.875,36.875
NetR15_2: R15.2 VT1.1 VT2.3 | length 6.4
  Top Layer w0.5: VT1.1@86.725,41.425 VT2.3@88.175,41.425 88.175,40.675 90.35,38.5 R15.2@90.35,37.425
NetR16_1: R16.1 R17.2 | length 2.1
  Top Layer w1.5: R17.2@91.375,32.425 R16.1@93.475,32.425
NetR18_2: R18.2 S1.3 | length 3.4
  Top Layer w1: S1.3@82.37,6.59 82.37,3.305 R18.2@82.475,3.2
NetR20_1: R20.1 S1.5 S1.6 | length 12.6
  Top Layer w1: R20.1@70.7,13.7 73.7,10.7 v1(74.3,10.7) ; S1.6@74.75,6.59 S1.5@77.29,6.59
  Bottom Layer w0.6: S1.6@74.3,7.04 S1.6@74.75,6.59
  Bottom Layer w1: v1(73.4,10.7) v1(74.3,10.7) S1.6@74.3,7.04
NetR24_2: R24.2 S1.4 | length 3
  Top Layer w1: R24.2@79.83,3.605 S1.4@79.83,6.59
NetR56_2: R56.2 R57.2 | length 121.8
  Bottom Layer w0.8: v1(43.199,52.729) v1(165,52.729)
NetVD4_1: VD4.1 VD5.1 VD6.2 VD8.1 VD9.1 | length 22.2
  Top Layer w0.6: VD9.1@48.15,22.55 48.15,21.85 48.7,21.3 51.175,21.3 52.15,22.275 VD8.1@52.15,22.55 52.15,22.28 53.13,21.3 55.3,21.3 56.25,22.25 VD5.1@56.25,22.55 56.25,22.025 57.175,21.1 59.975,21.1 60.75,21.875 VD4.1@60.75,22.45 60.3,22.9 60.3,26.1 VD6.2@59.6,26.8
NetVD4_2: VD4.2 VD5.2 VD7.1 VD8.2 VD9.2 | length 20.2
  Top Layer w0.6: VD9.2@46.25,22.55 47.6,23.9 ; VD7.1@46.8,26.7 47.3,26.2 47.3,24.2 47.6,23.9 ; VD4.2@58.85,22.45 58.85,23.25 58.3,23.8 55,23.8 54.35,23.15 VD5.2@54.35,22.55 53,23.9 51.1,23.9 50.25,23.05 VD8.2@50.25,22.55 48.9,23.9 47.6,23.9
NRES: C39.1 pad.5@83.16,97.075 U3.7 | length 41
  Top Layer w0.25: C39.1@69.213,79.237 69.213,79.938 70.473,81.198 73.414,81.198 U3.7@73.423,81.189 73.434,81.2 74.6,81.2 75.025,81.625 v1(75.025,82) ; v1(72.725,85.175) 71.675,86.225 71.675,100.175 72.1,100.6 81.124,100.6 81.933,99.791 81.933,98.442 83.1,97.275 pad.5@83.21,97.275
  Bottom Layer w0.25: v1(72.725,85.175) 72.725,84.3 v1(75.025,82)
  other v1: 68.9,78.9
PX_IO0: DA4.10 U3.50 | length 31.6
  Top Layer w0.25: U3.50@82.473,86.239 82.473,87.398 82.725,87.65 v1(82.725,87.7) ; v1(87.225,89.125) 87.475,89.375 90.225,89.375 95.525,84.075 95.525,82.225 96.008,81.742 104.842,81.742 105.75,82.65 106.5,82.65 106.75,82.9 DA4.10@106.75,83.4
  Bottom Layer w0.25: v1(82.725,87.7) 82.875,87.55 83.25,87.925 85.5,87.925 ; 85.5,87.95 86.675,89.125 v1(87.225,89.125)
PX_MISO: DA4.9 U3.56 | length 35
  Top Layer w0.25: U3.56@79.473,86.239 79.473,89.434 80.364,90.325 90.95,90.325 96.8,84.475 96.8,83.075 97.683,82.192 104.581,82.192 105.789,83.4 DA4.9@106.25,83.4
PX_MOSI: DA4.7 U3.57 | length 34.3
  Top Layer w0.25: U3.57@78.973,86.239 78.973,89.571 80.177,90.775 91.225,90.775 98.9,83.1 103.75,83.1 104.925,84.275 104.925,84.31 105.115,84.5 105.15,84.5 105.2,84.55 DA4.7@105.6,84.55
PX_NCS: DA4.11 U3.54 | length 30.8
  Top Layer w0.25: U3.54@80.473,86.239 80.473,85.152 80.675,84.95 v1(84.05,84.95) ; v1(88.65,84.95) 91.2,82.4 94.713,82.4 95.888,81.225 105.075,81.225 106.05,82.2 106.702,82.2 107.25,82.748 DA4.11@107.25,83.4
  Bottom Layer w0.25: v1(84.05,84.95) v1(88.65,84.95)
PX_SCK: DA4.8 U3.55 | length 34.3
  Top Layer w0.25: U3.55@79.973,86.239 79.973,89.298 80.55,89.875 90.675,89.875 96.338,84.212 96.338,82.612 v1@96.35,82.6 ; v1(97.525,83.375) 98.258,82.642 104.292,82.642 105.6,83.95 DA4.8@105.6,84.05
  Bottom Layer w0.25: v1(96.25,82.525) 96.675,82.525 v1(97.525,83.375)
QS_CLK: U3.29 U5.6 | length 10.6
  Top Layer w0.3: U5.6@81.275,68.06 83.335,68.06 84,68.725 84,70.825 83.558,71.267 82.408,71.267 81.473,72.202 U3.29@81.473,74.639
QS_D0: U3.27 U5.5 | length 5.9
  Top Layer w0.25: U3.27@80.473,74.639 80.473,72.403 81.625,71.25 81.625,69.68 U5.5@81.275,69.33
QS_D1: U3.26 U5.2 | length 12.5
  Top Layer w0.25: U3.26@79.973,74.639 79.973,71.877 v1(80.75,71.1) ; v1(84.425,67.5) 84.425,66.95 84.585,66.79 U5.2@87.275,66.79
  Bottom Layer w0.25: v1@84.35,67.5 v1(84.425,67.5)
  Bottom Layer w0.5: v1(80.75,71.1) v1@84.35,67.5
QS_NCS: U3.30 U5.1 | length 11.4
  Top Layer w0.25: U3.30@81.973,74.639 81.973,72.452 82.675,71.75 84.3,71.75 84.875,71.175 84.875,70.55 v1(84.875,68.55)
  Bottom Layer w0.25: v1(85.425,65.675) v1@85.5,65.75
  Bottom Layer w0.3: v1(84.875,68.55) 85.5,67.925 v1@85.5,65.75
RES_AT: DA6.8 U3.10 | length 65.6
  Top Layer w0.254: DA6.8@42.933,81.492 38.417,81.492 36.9,79.975 36.9,70.6 41.5,66 64.1,66 v1(65.3,67.2) v1@65.527,67.427
  Top Layer w0.3: v1(65.3,72.4) 65.3,75.2 66.2,76.1 69.4,76.1 70.7,77.4 70.7,78.175 72.214,79.689 U3.10@73.423,79.689
  Bottom Layer w0.3: v1(65.3,67.2) v1(65.3,72.4)
RES_CC: DA2.2 DA4.2 U3.40 | length 67.6
  Top Layer w0.25: U3.40@85.023,80.189 89.511,80.189 v3(89.8,79.9) ; v3(91.9,81.6) 94.877,81.6 96.027,80.45 v1(99.95,80.45) 99.95,78.575 106.275,72.25 120.6,72.25 123.125,74.775 v1(123.125,75.05) ; v1(99.925,83.9) 99.925,86.45 101.1,87.625 104.425,87.625 105,87.05 DA4.2@105.6,87.05 ; v1@127.35,75 131.62,75 132.291,74.329 DA2.2@132.726,74.329
  Bottom Layer w0.25: v3(89.8,79.9) 89.9,79.8 91.7,81.6 v3(91.9,81.6) ; v1(99.925,83.9) 99.925,80.475 v1(99.95,80.45) ; v1(123.125,75.05) 127.25,75.05 v1@127.301,75.101
  other v1: 127.35,75.15
RFIN: R32.1 R34.2 R40.1 | length 44.6
  Top Layer w0.5: R32.1@143.376,68.979 R34.2@144.851,68.979 R32.1@143.451,68.979 ; 144.376,68.9 v1(148.7,68.9)
  Bottom Layer w0.5: v1(148.225,57.8) 148.225,55.775 148.5,55.5 161,55.5 161,63 155.1,68.9 v1@148.5,68.9
RFOUT: C20.2 C22.2 L2.2 R39.1 | length 94.3
  Top Layer w0.5: C22.2@139.226,60.929 140.146,60.929 L2.2@140.626,61.409 ; L2.2@140.996,61.779 C20.2@142.126,61.779 142.4,61.505 v1(142.4,60.9)
  Bottom Layer w0.5: v1@57,55.507 142.107,55.507 142.4,55.8 v1(142.4,60.9)
  other v1: 57.05,55.65
SWCLK: pad.2@75.54,97.075 U3.49 | length 18.3
  Top Layer w0.25: pad.2@75.59,97.275 75.59,96.61 77.275,94.925 82.8,94.925 82.925,94.8 v1(82.925,92.45) ; U3.49@82.973,86.239 82.973,86.773 83.525,87.325 83.525,88.625 v1(83.125,89.025)
  Bottom Layer w0.25: v1(82.925,92.45) 82.925,88.775 82.951,88.749 83.125,88.922 v1(83.125,89.025)
SWDIO: pad.4@80.62,97.075 U3.46 | length 20.7
  Top Layer w0.3: pad.4@80.67,97.275 80.67,96.155 81.425,95.4 85.15,95.4 85.475,95.075 v1(85.475,92.55) ; U3.46@85.023,83.189 86.164,83.189 86.675,83.7 86.675,87.525 85.525,88.675 v1(85.525,89)
  Bottom Layer w0.3: v1(85.475,92.55) 85.475,88.725 85.525,88.775 v1(85.525,89)
U3RX: P1.1 U3.52 | length 8
  Top Layer w0.25: v1(80.9,89.05) 81.473,88.477 U3.52@81.473,86.239
  Bottom Layer w0.3: P1.1@79.125,93.15 79.375,93.15 80.9,91.625 v1(80.9,89.05)
U3TX: P1.2 U3.51 | length 7.1
  Top Layer w0.25: U3.51@81.973,86.239 81.973,89.073 v1(82.05,89.15)
  Bottom Layer w0.25: P1.2@81.665,93.15 P1.2@81.95,92.865
  Bottom Layer w0.3: P1.2@81.95,92.865 82.05,92.765 v1(82.05,89.15)
V1+: C51.2 C53.2 C56.2 C57.2 C60.1 C61.2 C65.2 C75.2 C87.2 DA4.1 DA4.5 DA4.12 DA4.13 DA4.15 DA4.22 DA4.25 DA4.27 DA4.28 R49.1 R51.1 | length 84.2
  Top Layer w0.25: 101.2,89.875 103.725,89.875 C56.2@104.85,88.75 ; C61.2@103.85,85.55 DA4.5@105.6,85.55 ; C56.2@104.725,88.425 DA4.1@105.6,87.55 ; C51.2@106.85,81.45 106.85,81.7 107.75,82.6 ; DA4.12@107.75,83.4 107.75,82.6 ; DA4.13@108.25,83.4 108.25,83.1 107.75,82.6 ; DA4.28@108.25,88.2 C65.2@108.25,89.2 ; C65.2@108.5,89.45 108.75,89.2 DA4.27@108.75,88.2 ; 108.7,92.55 111.5,92.55 112.4,91.65 113.1,91.65 113.8,90.95 113.8,88.25 112.85,88.25 C60.1@112.05,87.45 111.15,86.55 DA4.22@110.4,86.55 ; R51.1@108.75,77.825 110.3,79.375 110.3,80.95 109.8,81.45 C57.2@109.5,81.45 109.25,81.7 DA4.15@109.25,83.4 ; DA4.25@109.75,88.2 109.75,88.3 111.2,89.75 C53.2@111.2,89.9 112.1,90.8 112.1,91.95
  Top Layer w0.3: v1(101.2,86.45) 101.4,86.65 103.3,86.65 103.65,86.3 C61.2@103.65,85.75
  Top Layer w0.5: v1(101,84) 101,86.25 v1(101.2,86.45) ; v1(101.025,80.5) 105.775,80.5 ; v1(101.2,88.65) 101.2,89.875 100.175,89.875 99.6,90.45 99.6,93.55 101.7,95.65 108,95.65 108.7,94.95 v1(108.7,92.05) ; C51.2@106.85,81.45 106.125,81.45 105.775,81.1 105.775,79.075 107,77.85 108.725,77.85 R51.1@108.75,77.825 C75.2@108.75,76.525 108.75,75.225
  Bottom Layer w0.25: v1(108.5,89.75) 108.5,90.75 108.7,90.95 v1(108.7,92.05)
  Bottom Layer w0.5: v1(101,84) 101.025,83.975 v1(101.025,80.5) ; v1(101.2,86.45) v1(101.2,88.65)
pads on no net: DA1.6 DA2.16 DA2.18 DA4.3 DA4.4 DA4.16 DA5.3 DA6.9 DA6.17 DD1.7 DD1.10 U3.16 U3.25 U3.28 U3.61 U3.62

## Polygon pours and split planes (outlines as drawn)
GND_IS1 on Bottom Layer "GND_IS1" (solid, pour order 5): 115.8,43.55 115.5,43.25 115.5,1.5 38.5,1.5 38.5,23.5 58.5,43.5 58.55,43.55 115.8,43.55
GND on Bottom Layer "GND" (solid, remove dead copper, pour order 18): 140.5,107.632 140.868,108 208,108 208,0.984 118.5,0.984 118.5,47 183.5,47 183.5,60.5 32,60.5 32,107.632
GND on Top Layer "GND_C" (solid, remove dead copper, pour order 7): 0.5,107.5 36.5,107.5 36.5,70.5 36.5,69.5 43.45,62.55 143.55,62.55 158.5,77.5 175.5,77.5 189.5,77.5 190.5,77.5 196.5,71.5 198.4,69.6 198.4,38.5 198.4,36.4 189.5,28.5 188.5,28.5 157.3,28.5 145.5,48.5 101.1,48.5 56.5,48.5 56.5,44.5 35.5,24.26 35.5,0.5 -0.5,0.5

## Keep-outs
Keep-Out Layer:
  lines w0.025: 11.309,94.624 11.309,105.546 ; 11.312,2.469 ccw(c13.345,2.471) 13.344,0.437 ; 11.312,2.476 11.312,13.398 ccw(c2.168,13.398) 2.168,22.542 cw(c2.169,24.575) 0.136,24.574 0.136,33.515 7.248,33.515 7.248,74.561 0.136,74.561 0.136,83.502 cw(c2.169,83.501) 2.168,85.534 ccw(c2.168,94.678) 11.312,94.678 ; 11.312,105.6 cw(c13.345,105.599) 13.344,107.632 193.938,107.632 cw(c193.938,105.6) 195.97,105.6 195.97,94.678 ccw(c205.114,94.678) 205.114,85.534 cw(c205.114,83.502) 207.146,83.502 207.146,74.561 200.034,74.561 200.034,33.515 207.146,33.515 207.146,24.574 cw(c205.113,24.575) 205.114,22.542 ccw(c205.114,13.398) 195.97,13.398 195.97,2.476 cw(c193.937,2.477) 193.938,0.444 13.344,0.444

## Other copper
Top Layer:
  region net +3V3D: 73.988,95.77 73.988,99.656 72.083,99.656 72.083,95.77
  region net SWCLK: 76.528,95.77 76.528,99.656 74.623,99.656 74.623,95.77
  region net GND: 79.068,95.77 79.068,99.656 77.163,99.656 77.163,95.77
  region net NRES: 84.148,95.77 84.148,99.656 82.243,99.656 82.243,95.77
  region net SWDIO: 81.608,95.77 81.608,99.656 79.703,99.656 79.703,95.77
  region net NetFV1_1: 39.267,49.899 39.281,49.903 39.295,49.91 39.306,49.92 39.316,49.931 39.323,49.945 39.327,49.959 39.329,49.974 39.329,58.102 39.327,58.117 39.323,58.131 39.316,58.145 39.306,58.156 39.295,58.166 39.281,58.173 39.267,58.177 39.252,58.179 27.568,58.179 27.553,58.177 27.539,58.173 27.526,58.166 27.514,58.156 25.228,55.87 25.218,55.859 25.211,55.845 25.207,55.831 25.206,55.816 25.206,52.26 25.207,52.245 25.211,52.231 25.218,52.217 25.228,52.206 27.514,49.92 27.526,49.91 27.539,49.903 27.553,49.899 27.568,49.897 39.252,49.897
  pour cut-out: 24.1,59.3 24.1,48.8 40.3,48.8 40.3,59.3
  pour cut-out: 166.8,59.2 166.8,48.7 183,48.7 183,59.2
  region net NetFV1_1: 168.015,58.177 168.001,58.173 167.988,58.166 167.976,58.156 167.966,58.145 167.959,58.131 167.955,58.117 167.954,58.102 167.954,49.974 167.955,49.959 167.959,49.945 167.966,49.931 167.976,49.92 167.988,49.91 168.001,49.903 168.015,49.899 168.03,49.897 179.714,49.897 179.729,49.899 179.743,49.903 179.757,49.91 179.768,49.92 182.054,52.206 182.064,52.217 182.071,52.231 182.075,52.245 182.077,52.26 182.077,55.816 182.075,55.831 182.071,55.845 182.064,55.859 182.054,55.87 179.768,58.156 179.757,58.166 179.743,58.173 179.729,58.177 179.714,58.179 168.03,58.179
Bottom Layer:
  region net NRES: 84.098,95.77 84.098,99.656 82.193,99.656 82.193,95.77
  region net NRES: 84.148,95.77 84.148,99.656 82.243,99.656 82.243,95.77
  region net SWDIO: 81.558,95.77 81.558,99.656 79.653,99.656 79.653,95.77
  region net GND: 79.018,95.77 79.018,99.656 77.113,99.656 77.113,95.77
  region net SWCLK: 76.478,95.77 76.478,99.656 74.573,99.656 74.573,95.77
  region net +3V3D: 73.938,95.77 73.938,99.656 72.033,99.656 72.033,95.77
  rectangle net GND: 30,42.4 34.7,47.1
  pour cut-out: 23.642,47.359 23.627,47.363 23.614,47.37 23.602,47.38 23.593,47.391 23.586,47.405 23.581,47.419 23.58,47.434 23.58,60.693 23.581,60.708 23.586,60.722 23.593,60.735 23.602,60.747 23.614,60.756 23.627,60.764 23.642,60.768 23.657,60.769 41.03,60.769 41.045,60.768 41.059,60.764 41.073,60.756 41.084,60.747 41.094,60.735 41.101,60.722 41.105,60.708 41.107,60.693 41.107,47.434 41.105,47.419 41.101,47.405 41.094,47.391 41.084,47.38 41.073,47.37 41.059,47.363 41.045,47.359 41.03,47.357 23.657,47.357
  region net NetFV1_1: 37.997,50.407 38.011,50.411 38.025,50.418 38.036,50.428 38.046,50.439 38.053,50.453 38.057,50.467 38.059,50.482 38.059,57.594 38.057,57.609 38.053,57.623 38.046,57.637 38.036,57.648 38.025,57.658 38.011,57.665 37.997,57.669 37.982,57.671 26.679,57.671 26.664,57.669 26.65,57.665 26.637,57.658 26.625,57.648 26.615,57.637 26.608,57.623 26.604,57.609 26.603,57.594 26.603,50.482 26.604,50.467 26.608,50.453 26.615,50.439 26.625,50.428 26.637,50.418 26.65,50.411 26.664,50.407 26.679,50.405 37.982,50.405
  region net NetFV1_1: 180.656,50.369 180.67,50.373 180.684,50.38 180.695,50.39 180.705,50.401 180.712,50.415 180.716,50.429 180.718,50.444 180.718,57.556 180.716,57.571 180.712,57.585 180.705,57.599 180.695,57.61 180.684,57.62 180.67,57.627 180.656,57.631 180.641,57.633 169.338,57.633 169.323,57.631 169.309,57.627 169.296,57.62 169.284,57.61 169.274,57.599 169.267,57.585 169.263,57.571 169.262,57.556 169.262,50.444 169.263,50.429 169.267,50.415 169.274,50.401 169.284,50.39 169.296,50.38 169.309,50.373 169.323,50.369 169.338,50.367 180.641,50.367
  pour cut-out: 166.263,47.359 166.248,47.363 166.235,47.37 166.223,47.38 166.214,47.391 166.207,47.405 166.202,47.419 166.201,47.434 166.201,60.693 166.202,60.708 166.207,60.722 166.214,60.735 166.223,60.747 166.235,60.756 166.248,60.764 166.263,60.768 166.278,60.769 183.651,60.769 183.666,60.768 183.68,60.764 183.694,60.756 183.705,60.747 183.715,60.735 183.722,60.722 183.726,60.708 183.728,60.693 183.728,47.434 183.726,47.419 183.722,47.405 183.715,47.391 183.705,47.38 183.694,47.37 183.68,47.363 183.666,47.359 183.651,47.357 166.278,47.357

## Silkscreen, mask and mechanical layers (free items; w line width, h text height)
Top Overlay:
  lines w0.2: 71.73,95.805 71.73,100.1 84.43,100.1 84.43,95.805
  text "3V+" at 72.1,100.6 h1.6
  text "CLK" at 74.8,100.6 h1.6
  text "Gnd" at 77.3,100.6 h1.6
  text "DIO" at 79.9,100.6 h1.6
  text "Res" at 82.5,100.6 h1.6
  text "Rx" at 78.2,90.8 h1
  text "Tx" at 80.8,90.8 h1
  text "V+" at 83.5,90.8 h1
  text "G-" at 86.2,90.8 h1
Bottom Overlay:
  drawing of 2838 lines, arcs and shapes, not listed
  text "Rev 1.3" at 75.6,104 h5 r180
  text "РМВА.758725.018,  изм." at 130.997,102.82 h6 r180
  text "LSR" at 54.9,101.1 h3 r180
  text "NTPC" at 63.3,101.106 h3 r180
  text "РМВА.468213.029,  изм." at 130.997,95.82 h6 r180
  text "ПО:" at 130.997,88.82 h6 r180
  text "МАС:" at 158.497,88.82 h6 r180
  text "Индустрия" at 30.7,88.3 h6 r180
  text "МС-Р4" at 129.997,81.82 h6 r180
  text "OTK" at 96.6,73.8 h2 r180
  text "станция" at 157.7,28.2 h6 r180
  text "Базовая" at 157.7,23.991 h6 r180
  text "ШАХТА" at 17.8,12.3 h6 r180
  text "GND" at 42.1,11.9 h2 r270
  text "TD+(B)" at 52,11.8 h2 r270
  text "RD+(B)" at 57,11.8 h2 r270
  text "RD-(A)" at 62,11.8 h2 r270
  text "TD-(A)" at 47,11.7 h2 r270
  text "+V GND H L" at 178.7,11.6 h2.5
Top Solder:
  region: 84.148,95.77 84.148,99.656 82.243,99.656 82.243,95.77
  region: 81.608,95.77 81.608,99.656 79.703,99.656 79.703,95.77
  region: 79.068,95.77 79.068,99.656 77.163,99.656 77.163,95.77
  region: 76.528,95.77 76.528,99.656 74.623,99.656 74.623,95.77
  region: 73.988,95.77 73.988,99.656 72.083,99.656 72.083,95.77
  rectangle: 29.95,42.009 34.45,46.509
  rectangle: 172.7,61.93 177.2,66.43
  rectangle: 24.6,49.8 39.7,58.3
  rectangle: 167.459,49.762 182.559,58.262
Bottom Solder:
  region: 73.938,95.77 73.938,99.656 72.033,99.656 72.033,95.77
  region: 76.478,95.77 76.478,99.656 74.573,99.656 74.573,95.77
  region: 79.018,95.77 79.018,99.656 77.113,99.656 77.113,95.77
  region: 81.558,95.77 81.558,99.656 79.653,99.656 79.653,95.77
  region: 84.098,95.77 84.098,99.656 82.193,99.656 82.193,95.77
  rectangle: 30,42.4 34.8,47.1
  rectangle: 172.45,61.709 176.95,66.209
  region: 38.124,50.28 38.138,50.284 38.152,50.291 38.163,50.301 38.173,50.312 38.18,50.326 38.184,50.34 38.186,50.355 38.186,57.721 38.184,57.736 38.18,57.75 38.173,57.764 38.163,57.775 38.152,57.785 38.138,57.792 38.124,57.796 38.109,57.798 26.552,57.798 26.537,57.796 26.523,57.792 26.51,57.785 26.498,57.775 26.488,57.764 26.481,57.75 26.477,57.736 26.476,57.721 26.476,50.355 26.477,50.34 26.481,50.326 26.488,50.312 26.498,50.301 26.51,50.291 26.523,50.284 26.537,50.28 26.552,50.278 38.109,50.278
  region: 180.745,50.28 180.759,50.284 180.773,50.291 180.784,50.301 180.794,50.312 180.801,50.326 180.805,50.34 180.807,50.355 180.807,57.721 180.805,57.736 180.801,57.75 180.794,57.764 180.784,57.775 180.773,57.785 180.759,57.792 180.745,57.796 180.73,57.798 169.173,57.798 169.158,57.796 169.144,57.792 169.131,57.785 169.119,57.775 169.109,57.764 169.102,57.75 169.098,57.736 169.097,57.721 169.097,50.355 169.098,50.34 169.102,50.326 169.109,50.312 169.119,50.301 169.131,50.291 169.144,50.284 169.158,50.28 169.173,50.278 180.73,50.278
Mechanical 2:
  lines w0.152: 26.374,50.152 38.338,50.152 38.338,57.924 26.374,57.924 26.374,50.152 ; 168.945,50.152 180.908,50.152 180.908,57.924 168.945,57.924 168.945,50.152
  lines w0.203: 26.755,54.038 28.889,54.038 ; 35.823,54.038 37.957,54.038 ; 169.326,54.038 171.459,54.038 ; 178.393,54.038 180.527,54.038
  text ".Pattern" at 32.4,54.505 h0.7 r180
  text ".Pattern" at 174.882,53.571 h0.7
  text ".Designator" at 33.168,51.768 h0.7 r180
Mechanical 16:
  circle w0.025: c2.168,13.398 r0.13
  circle w0.025: c2.168,94.678 r0.102